# Altium PCB USB_FPC_Down.PcbDoc
Units mm, origin at the board's own origin, x right, y up, seen from the top; angles counter-clockwise.
Board outline 13.72 x 14.35 mm, 2 copper layers (Top Layer, Bottom Layer); 2 components, 4 nets, 12 pads, 0 vias.
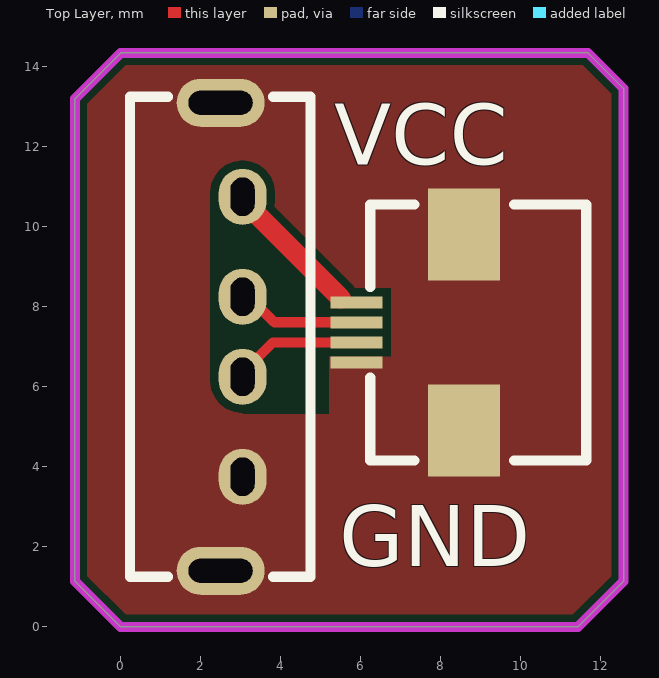
[diagram p0: Top Layer view]
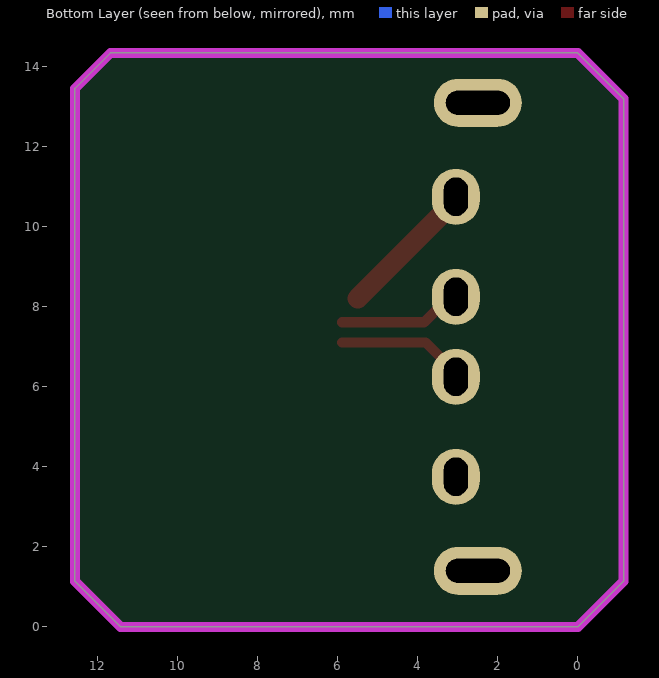
[diagram p1: Bottom Layer view, seen from below]

## Layer stack, top to bottom
Top Solder: solder mask 0.0102, Solder Resist, Dk 3.5
Top Layer: signal copper 0.0356
Dielectric 1: dielectric 0.32, FR-4, Dk 4.8
Bottom Layer: signal copper 0.0356
Bottom Solder: solder mask 0.0102, Solder Resist, Dk 3.5

## Board outline
-1.143,1.143 0,0 11.43,0 12.573,1.143 12.573,13.462 11.684,14.351 0,14.351 -1.143,13.208

## Design rules (kind name [scope] priority, off if disabled: settings)
Clearance [All] p1: gap=0.2 ignorepadtopadclearanceinfootprint=FALSE except(0: Arc-Hole Track-Hole SMDPad-Hole THPad-Hole Via-Hole Fill-Hole Poly-Hole Region-Hole Text-Hole; 0.1: Arc-SMDPad Track-SMDPad SMDPad-SMDPad; 0.18: Arc-Arc Arc-Track Arc-THPad Arc-Via Arc-Fill Arc-Poly Arc-Region Arc-Text Track-Track Track-THPad Track-Via Track-Fill Track-Poly Track-Region Track-Text; 0.5: THPad-THPad THPad-Via Via-Via)
HoleToHoleClearance [All] p1: gap=0.305 allowstackedmicrovias=TRUE
MinimumSolderMaskSliver [All] p1: minsoldermaskwidth=0.099
PasteMaskExpansion [All] p1: expansion=0.05
PlaneClearance [All] p1: clearance=0.254
PlaneConnect [All] p1: planeconnectstyle=Direct reliefexpansion=0.508 reliefentries=4 reliefconductorwidth=0.254 reliefairgap=0.254
PolygonConnect [All] p1: connectstyle=Direct reliefconductorwidth=0.254 reliefentries=4 polygonreliefangle="90 Angle" airgapwidth=0.254
RoutingVias [All] p1: holewidth=0.6 width=1.2 viastyle="Through Hole" minholewidth=0.6 minwidth=1.2 maxholewidth=0.6 maxwidth=1.2
SilkToSilkClearance [All] p1: silktosilkclearance=0.051
SilkToSolderMaskClearance [IsPad] p1: minsilkscreentomaskgap=0.102 clearancetoexposedcopper=TRUE
SolderMaskExpansion [All] p1: expansion=0.1 istentingtop=FALSE
UnRoutedNet [All] p1: checkbadconnections=TRUE
Width PWR_idth [InNetClass('PWR')] p1: maxlimit=0.508 minlimit=0.381 preferedwidth=0.508 minimp=50.000000 maximp=50.000000 favimp=50.000000
Width [All] p2: maxlimit=0.254 minlimit=0.254 preferedwidth=0.254
22 further rules are at their usual default settings.

## Classes and differential pairs
net class PWR: GND VCC

## Components (designator, comment, footprint, x,y, rotation, side; value= is the part's Value field where it differs from the comment)
J1 "U-G-04DD-W-4" USB-TH_U-G-04DD-W-4 2.773,7.255 r270 top
J2 "AFC01-S04FCC-00" FFC-SMD_4P-P0.50_AFC01-S04FCC-00 7.239,7.366 r90 top

## Footprints (in the part's own frame and the unit in brackets; to place one, negate y for a bottom-side part, rotate by r counter-clockwise, add the part's x,y. Pads: shape width x height; smd on the part's side, far side on the other; paste and mask are expansions set on the pad)
FFC-SMD_4P-P0.50_AFC01-S04FCC-00 [mm]
  rect 0.3x1.3 smd paste+0 mask+0.05: 1(-0.75,1.34) 2(-0.25,1.34) 3(0.25,1.34) 4(0.75,1.34)
  rect 2.3x1.8 smd: 5(2.45,-1.34) 6(-2.45,-1.34)
  silkscreen extent -3.2,-4.4 3.2,1
USB-TH_U-G-04DD-W-4 [mm]
  oval 1.4x1.2 hole 0.6 slot 0.96 at 0 deg: 1(-3.5,0.275) 2(-1,0.275) 3(1,0.275) 4(3.5,0.275)
  oval 1.2x2.2 hole 0.6 slot 1.6 at 90 deg: 5(-5.85,-0.275) 6(5.85,-0.275)
  silkscreen extent -6,-2.54 6,1.98

## Part data
J1: library part "USB U-G-04DD-W-4", "直插式USB-A公头", Current Rating - Power (Max)=-, JLCPCB Part Class="Extended Part", LCSC Part Name="Type-A 公 直插", Manufacturer=韩国韩荣, Operating Temperature Range=-55℃~+85℃, Add into BOM=yes, Connector Type=Type-A, Convert to PCB=yes, Datasheet=https://atta.szlcsc.com/upload/public/pdf/source/20210810/0A35F1E9B38E7EA5C3EF6C12E1E2A06B.pdf, Device=U-G-04DD-W-4, Gender=公, Manufacturer Part=U-G-04DD-W-4, Mounting Style=直插, Number of Contacts=4P, Number of Ports=1, Standard="USB 2.0", Supplier=LCSC, Supplier Footprint=插件, Supplier Part=C879731, Symbol=U-G-04DD-W-4
J2: library part "FPC AFC01-S04FCC-00", "4pin FPC接口", JLCPCB Part Class="Extended Part", LCSC Part Name="间距:0.5mm P数:4P 翻盖式 下接", Manufacturer=JS(钜硕电子), Add into BOM=yes, Contact Type=下接, Convert to PCB=yes, Datasheet=https://atta.szlcsc.com/upload/public/pdf/source/20190816/C413942_2A72D1AC756EAE17EEDF756A339D4500.pdf, Device=AFC01-S04FCC-00, FFC, FCB Thickness=0.3mm, Height Above Board=2mm, Locking Feature=翻盖式, Manufacturer Part=AFC01-S04FCC-00, Mounting Type=卧贴, Number of Contacts=4P, Pitch=0.5mm, Supplier=LCSC, Supplier Footprint=SMD,P=0.5mm,卧贴, Supplier Part=C262260, Symbol=AFC01-S04FCC-00

## Nets (pads, with @x,y where several pads share a name; then routed paths per layer and width w, separated by ;. In a path a pad name is that pad's centre, name@x,y a point inside that pad or via, vN(x,y) a via of type N, cw(c..) or ccw(c..) an arc to the next point about the centre after c; other vN are vias at no path point)
D+: J1.3 J2.2 | length 3.3
  Top Layer w0.254: J1.3 3.048,6.355 3.809,7.116 J2.2
D-: J1.2 J2.3 | length 3.1
  Top Layer w0.254: J1.2 3.204,8.255 3.843,7.616 J2.3
GND: J1.4 J1.5 J1.6 J2.1 J2.5 J2.6
VCC: J1.1 J2.4 | length 3.6
  Top Layer w0.508: J1.1 3.048,10.668 J2.4@5.503,8.213

## Polygon pours and split planes (outlines as drawn)
GND on Top Layer "GND_L01_P000" (solid, pour order 0): -1.143,1.143 0,0 11.43,0 12.573,1.143 12.573,13.462 11.684,14.351 0,14.351 -1.143,13.208

## Keep-outs
Keep-Out Layer:
  the board outline again, w0.254

## Other copper
Top Layer:
  pour cut-out: 2.241,10.855 2.241,6.155 3.062,5.334 5.207,5.334 5.207,7.883 5.034,8.056

## Silkscreen, mask and mechanical layers (free items; w line width, h text height)
Top Overlay:
  text "VCC" at 5.334,11.557 h1.52
  text "GND" at 5.461,1.524 h1.52